# Altium PCB traintrackr.PcbDoc
Units mm, origin at the board's own origin, x right, y up, seen from the top; angles counter-clockwise.
Board outline 304.8 x 102.87 mm, 2 copper layers (Top Layer, Bottom Layer); 146 components, 38 nets, 354 pads, 138 vias.
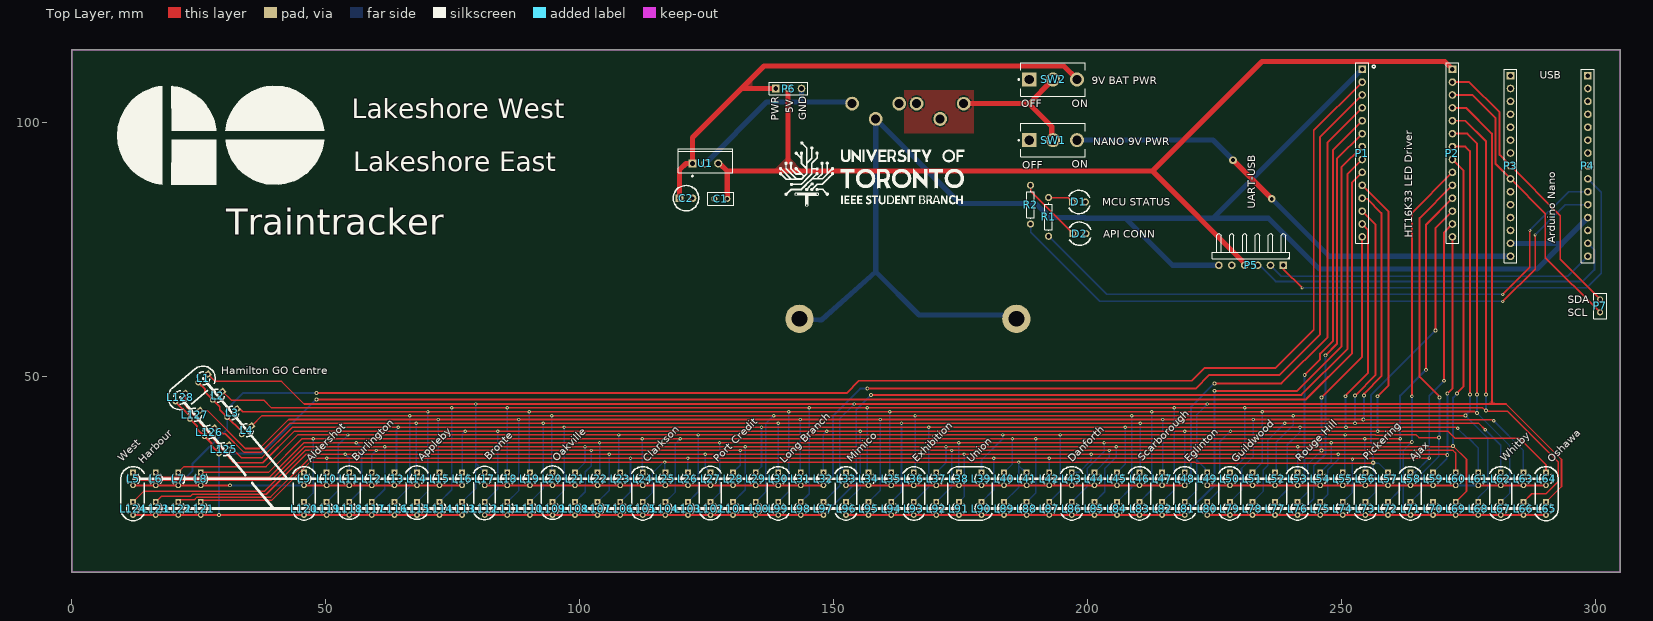
[diagram p0: Top Layer view]
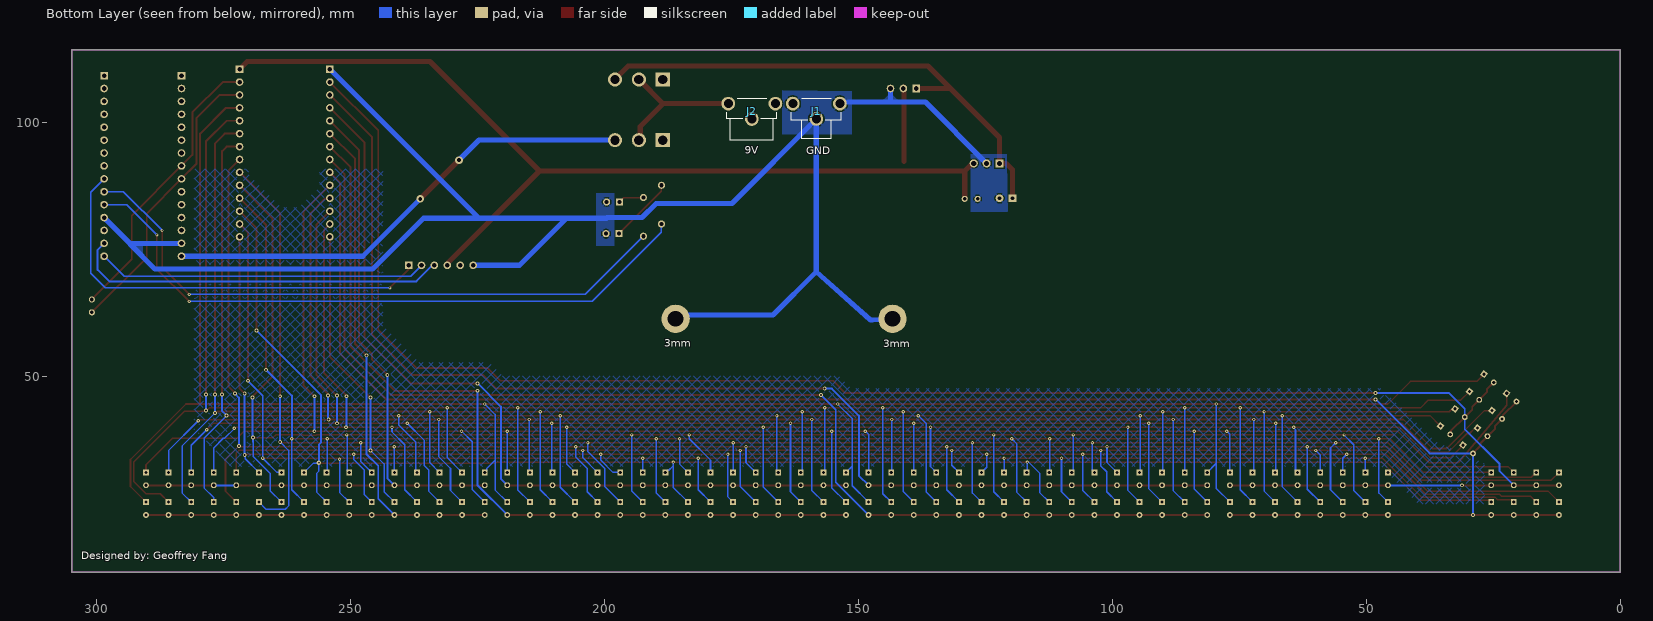
[diagram p1: Bottom Layer view, seen from below]

## Layer stack, top to bottom
Top Solder: solder mask 0.0102, Solder Resist, Dk 3.5
Top Layer: signal copper 0.0356
Dielectric 1: dielectric 0.32, FR-4, Dk 4.8
Bottom Layer: signal copper 0.0356
Bottom Solder: solder mask 0.0102, Solder Resist, Dk 3.5

## Board outline
0,11.43 0,114.3 304.8,114.3 304.8,11.43

## Design rules (kind name [scope] priority, off if disabled: settings)
Clearance [All] p1: gap=0.254 ignorepadtopadclearanceinfootprint=FALSE except(0: Arc-Hole Track-Hole SMDPad-Hole THPad-Hole Via-Hole Fill-Hole Poly-Hole Region-Hole Text-Hole)
HoleSize [All] p1: absolutevalues=TRUE maxlimit=22.86 minlimit=0.305 maxpercent=80.000 minpercent=20.000
MinimumSolderMaskSliver [All] p1: minsoldermaskwidth=0.025
PolygonConnect [All] p1: connectstyle=Relief reliefconductorwidth=0.381 reliefentries=4 polygonreliefangle="90 Angle" conductorbypadedge=TRUE mindistance=0.381 enablemindistance=FALSE airgapwidth=0.254
RoutingVias [All] p1: holewidth=0.305 width=0.61 viastyle="Through Hole" minholewidth=0.305 minwidth=0.61 maxholewidth=2.54 maxwidth=5.08
SilkToSilkClearance [All] p1: silktosilkclearance=0
SilkToSolderMaskClearance [IsPad] p1: minsilkscreentomaskgap=0.025 clearancetoexposedcopper=TRUE
SolderMaskExpansion [All] p1: expansion=0.102 istentingtop=FALSE
Width [All] p1: maxlimit=2.54 minlimit=0.254 preferedwidth=0.381 minimp=50.000000 maximp=50.000000 favimp=50.000000
26 further rules are at their usual default settings.

## Classes and differential pairs
net class C[7..0]: C0 C1 C2 C3 C4 C5 C6 C7
net class A[15..0]: A0 A1 A2 A3 A4 A5 A6 A7 A8 A9 A10 A11 A12 A13 A14 A15
component class traintrackr_schematic: C1 C2 D1 D2 J1 J2 P1 P2 P3 P4 P5 P6 P7 R1 R2 SW1 SW2 U1
component class led_matrix: L1 L2 L3 L4 L5 L6 L7 L8 L9 L10 L11 L12 L13 L14 L15 L16 L17 L18 L19 L20 L21 L22 L23 L24 L25 L26 L27 L28 L29 L30 L31 L32 L33 L34 L35 L36 L37 L38 L39 L40 L41 L42 L43 L44 L45 L46 L47 L48 L49 L50 L51 L52 L53 L54 L55 L56 L57 L58 L59 L60 L61 L62 L63 L64 L65 L66 L67 L68 L69 L70 L71 L72 L73 L74 L75 L76 L77 L78 L79 L80 L81 L82 L83 L84 L85 L86 L87 L88 L89 L90 L91 L92 L93 L94 L95 L96 L97 L98 L99 L100 L101 L102 L103 L104 L105 L106 L107 L108 L109 L110 L111 L112 L113 L114 L115 L116 L117 L118 L119 L120 L121 L122 L123 L124 L125 L126 L127 L128

## Components (designator, comment, footprint, x,y, rotation, side; value= is the part's Value field where it differs from the comment)
C1 "Cap" RAD-0.1 127.762,84.963 r0 top value=0.1UF
C2 "Cap Pol1" "Capacitor 330nF" 119.634,85.09 r0 top value=0.33uF
D1 "POWER" LED_5MM 196.977,84.348 r0 top
D2 "API CONNECTION" LED_5MM 197.104,78.105 r0 top
J1 "593 - GND" FP-593-MFG 158.242,100.711 r0 bottom
J2 "594 - 9V" FP-594-MFG 170.942,100.584 r0 bottom
L1 "HC" PCBComponent_1 26.828,50.443 r220 top
L2 "HC1" PCBComponent_1 29.685,47.038 r220 top
L3 "HC2" PCBComponent_1 32.542,43.633 r220 top
L4 "HC3" PCBComponent_1 35.399,40.228 r220 top
L5 "WH" PCBComponent_1 12.065,31.115 r270 top
L6 "WH1" PCBComponent_1 16.51,31.115 r270 top
L7 "WH2" PCBComponent_1 20.955,31.115 r270 top
L8 "WH3" PCBComponent_1 25.4,31.115 r270 top
L9 "AS" PCBComponent_1 45.72,31.115 r270 top
L10 "AS1" PCBComponent_1 50.165,31.115 r270 top
L11 "BR" PCBComponent_1 54.61,31.115 r270 top
L12 "BR1" PCBComponent_1 59.055,31.115 r270 top
L13 "BR2" PCBComponent_1 63.5,31.115 r270 top
L14 "AB" PCBComponent_1 67.945,31.115 r270 top
L15 "AB1" PCBComponent_1 72.39,31.115 r270 top
L16 "AB2" PCBComponent_1 76.835,31.115 r270 top
L17 "BT" PCBComponent_1 81.28,31.115 r270 top
L18 "BT1" PCBComponent_1 85.725,31.115 r270 top
L19 "BT2" PCBComponent_1 90.17,31.115 r270 top
L20 "OK" PCBComponent_1 94.615,31.115 r270 top
L21 "OK1" PCBComponent_1 99.06,31.115 r270 top
L22 "OK2" PCBComponent_1 103.505,31.115 r270 top
L23 "OK3" PCBComponent_1 107.95,31.115 r270 top
L24 "CS" PCBComponent_1 112.395,31.115 r270 top
L25 "CS1" PCBComponent_1 116.84,31.115 r270 top
L26 "CS2" PCBComponent_1 121.285,31.115 r270 top
L27 "PC" PCBComponent_1 125.73,31.115 r270 top
L28 "PC1" PCBComponent_1 130.175,31.115 r270 top
L29 "PC2" PCBComponent_1 134.62,31.115 r270 top
L30 "LB" PCBComponent_1 139.065,31.115 r270 top
L31 "LB1" PCBComponent_1 143.51,31.115 r270 top
L32 "LB2" PCBComponent_1 147.955,31.115 r270 top
L33 "MM" PCBComponent_1 152.4,31.115 r270 top
L34 "MM1" PCBComponent_1 156.845,31.115 r270 top
L35 "MM2" PCBComponent_1 161.29,31.115 r270 top
L36 "EX" PCBComponent_1 165.735,31.115 r270 top
L37 "EX1" PCBComponent_1 170.18,31.115 r270 top
L38 "UN" PCBComponent_1 174.625,31.115 r270 top
L39 "UN" PCBComponent_1 179.07,31.115 r270 top
L40 "UN1" PCBComponent_1 183.515,31.115 r270 top
L41 "UN2" PCBComponent_1 187.96,31.115 r270 top
L42 "UN3" PCBComponent_1 192.405,31.115 r270 top
L43 "DN" PCBComponent_1 196.85,31.115 r270 top
L44 "DN1" PCBComponent_1 201.295,31.115 r270 top
L45 "DN2" PCBComponent_1 205.74,31.115 r270 top
L46 "SC" PCBComponent_1 210.185,31.115 r270 top
L47 "SC1" PCBComponent_1 214.63,31.115 r270 top
L48 "EG" PCBComponent_1 219.075,31.115 r270 top
L49 "EG1" PCBComponent_1 223.52,31.115 r270 top
L50 "GW" PCBComponent_1 227.965,31.115 r270 top
L51 "GW1" PCBComponent_1 232.41,31.115 r270 top
L52 "GW2" PCBComponent_1 236.855,31.115 r270 top
L53 "RH" PCBComponent_1 241.3,31.115 r270 top
L54 "RH1" PCBComponent_1 245.745,31.115 r270 top
L55 "RH2" PCBComponent_1 250.19,31.115 r270 top
L56 "PK" PCBComponent_1 254.635,31.115 r270 top
L57 "PK1" PCBComponent_1 259.08,31.115 r270 top
L58 "AJ" PCBComponent_1 263.525,31.115 r270 top
L59 "AJ1" PCBComponent_1 267.97,31.115 r270 top
L60 "AJ2" PCBComponent_1 272.415,31.115 r270 top
L61 "AJ3" PCBComponent_1 276.86,31.115 r270 top
L62 "WB" PCBComponent_1 281.305,31.115 r270 top
L63 "WB1" PCBComponent_1 285.75,31.115 r270 top
L64 "DCO" PCBComponent_1 290.195,31.115 r270 top
L65 "DCO" PCBComponent_1 290.195,25.273 r270 top
L66 "DCO1" PCBComponent_1 285.75,25.273 r270 top
L67 "WB" PCBComponent_1 281.305,25.273 r270 top
L68 "WB1" PCBComponent_1 276.86,25.273 r270 top
L69 "WB2" PCBComponent_1 272.415,25.273 r270 top
L70 "WB3" PCBComponent_1 267.97,25.273 r270 top
L71 "AJ" PCBComponent_1 263.525,25.273 r270 top
L72 "AJ1" PCBComponent_1 259.08,25.273 r270 top
L73 "PK" PCBComponent_1 254.635,25.273 r270 top
L74 "PK1" PCBComponent_1 250.19,25.273 r270 top
L75 "PK2" PCBComponent_1 245.745,25.273 r270 top
L76 "RH" PCBComponent_1 241.3,25.273 r270 top
L77 "RH1" PCBComponent_1 236.855,25.273 r270 top
L78 "RH2" PCBComponent_1 232.41,25.273 r270 top
L79 "GW" PCBComponent_1 227.965,25.273 r270 top
L80 "GW1" PCBComponent_1 223.52,25.273 r270 top
L81 "EG" PCBComponent_1 219.075,25.273 r270 top
L82 "EG1" PCBComponent_1 214.63,25.273 r270 top
L83 "SC" PCBComponent_1 210.185,25.273 r270 top
L84 "SC1" PCBComponent_1 205.74,25.273 r270 top
L85 "SC2" PCBComponent_1 201.295,25.273 r270 top
L86 "DN" PCBComponent_1 196.85,25.273 r270 top
L87 "DN1" PCBComponent_1 192.405,25.273 r270 top
L88 "DN2" PCBComponent_1 187.96,25.273 r270 top
L89 "DN3" PCBComponent_1 183.515,25.273 r270 top
L90 "UN" PCBComponent_1 179.07,25.273 r270 top
L91 "UN" PCBComponent_1 174.625,25.273 r270 top
L92 "UN1" PCBComponent_1 170.18,25.273 r270 top
L93 "EX" PCBComponent_1 165.735,25.273 r270 top
L94 "EX1" PCBComponent_1 161.29,25.273 r270 top
L95 "EX2" PCBComponent_1 156.845,25.273 r270 top
L96 "MM" PCBComponent_1 152.4,25.273 r270 top
L97 "MM1" PCBComponent_1 147.955,25.273 r270 top
L98 "MM2" PCBComponent_1 143.51,25.273 r270 top
L99 "LB" PCBComponent_1 139.065,25.273 r270 top
L100 "LB1" PCBComponent_1 134.62,25.273 r270 top
L101 "LB2" PCBComponent_1 130.175,25.273 r270 top
L102 "PC" PCBComponent_1 125.73,25.273 r270 top
L103 "PC1" PCBComponent_1 121.285,25.273 r270 top
L104 "PC2" PCBComponent_1 116.84,25.273 r270 top
L105 "CS" PCBComponent_1 112.395,25.273 r270 top
L106 "CS1" PCBComponent_1 107.95,25.273 r270 top
L107 "CS2" PCBComponent_1 103.505,25.273 r270 top
L108 "CS3" PCBComponent_1 99.06,25.273 r270 top
L109 "OK" PCBComponent_1 94.615,25.273 r270 top
L110 "OK1" PCBComponent_1 90.17,25.273 r270 top
L111 "OK2" PCBComponent_1 85.725,25.273 r270 top
L112 "BT" PCBComponent_1 81.28,25.273 r270 top
L113 "BT1" PCBComponent_1 76.835,25.273 r270 top
L114 "BT2" PCBComponent_1 72.39,25.273 r270 top
L115 "AB" PCBComponent_1 67.945,25.273 r270 top
L116 "AB1" PCBComponent_1 63.5,25.273 r270 top
L117 "AB2" PCBComponent_1 59.055,25.273 r270 top
L118 "BR" PCBComponent_1 54.61,25.273 r270 top
L119 "BR1" PCBComponent_1 50.165,25.273 r270 top
L120 "AS" PCBComponent_1 45.72,25.273 r270 top
L121 "AS-WH1" PCBComponent_1 25.4,25.273 r270 top
L122 "AS-WH2" PCBComponent_1 20.955,25.273 r270 top
L123 "AS-WH3" PCBComponent_1 16.51,25.273 r270 top
L124 "WH" PCBComponent_1 12.065,25.273 r270 top
L125 "AS-HC1" PCBComponent_1 30.924,36.473 r220 top
L126 "AS-HC2" PCBComponent_1 28.067,39.878 r220 top
L127 "AS-HC3" PCBComponent_1 25.21,43.283 r220 top
L128 "HC" PCBComponent_1 22.353,46.688 r220 top
P1 "HT16K33 LEFT" HDR1X14 254,110.49 r270 top
P2 "HT16K33 RIGHT" HDR1X14 271.78,110.49 r270 top
P3 "NANO Vin side, USB side pin 1" HDR1X15 283.21,109.22 r270 top
P4 "NANO Tx1 side, USB side pin 1" HDR1X15 298.45,109.22 r270 top
P5 "UART - GND LEFT" HDR1X6H 238.506,71.882 r180 top
P6 "Extra Power" HDR1X3 138.557,106.68 r0 top
P7 "I2C" RAD-0.1 300.863,63.881 r270 top
R1 "Res1" AXIAL-0.3 192.278,81.407 r90 top value=100
R2 "Res1" AXIAL-0.3 188.722,83.82 r90 top value=100
SW1 "1101M2S3CQE2" FP-1101M2S3CQE2-MFG 193.167,96.52 r0 top
SW2 "1101M2S3CQE2" FP-1101M2S3CQE2-MFG 193.167,108.458 r0 top
U1 "LM340T-5.0" NDE0003A 124.714,91.948 r0 top

## Footprints (in the part's own frame and the unit in brackets; to place one, negate y for a bottom-side part, rotate by r counter-clockwise, add the part's x,y. Pads: shape width x height; smd on the part's side, far side on the other; paste and mask are expansions set on the pad)
AXIAL-0.3 [mm] "Axial Device, Thru-Hole; 2 Leads; 0.3 in Pin Spacing"
  round 1.4 hole 0.85: 1(-3.81,0) 2(3.81,0)
  silkscreen extent -2.77,-0.76 2.77,0.76
"Capacitor 330nF" [mil]
  rect 60x60 hole 30: 1(0,0)
  round 60 hole 30: 2(100,0)
  silkscreen extent -48,-98 148,98
FP-593-MFG [mm]
  round 2.72 hole 1.77 paste-1000 mask+0: 1(-4.635,-2.99) 1(0,0.01) 1(4.635,-2.99)
  silkscreen extent -4.95,-3.95 4.95,3.95, body extent -4.83,-3.77 4.83,3.75, height 14.22
FP-594-MFG [mm]
  round 2.72 hole 1.77 paste-1000 mask+0: 1(-4.635,-3.115) 1(0,-0.115) 1(4.635,-3.115)
  silkscreen extent -4.95,-4.08 4.95,4.08, body extent -4.83,-3.89 4.83,3.88, height 14.22
FP-1101M2S3CQE2-MFG [mm]
  rect 2.8x2.8 hole 1.85 paste-1000 mask+0: 1(-4.7,0)
  round 2.8 hole 1.85 paste-1000 mask+0: 2(0,0) 3(4.7,0)
  silkscreen extent -6.87,-3.3 6.35,3.3, body extent -6.45,-3.4 6.45,3.4, height 0.25
HDR1X3 [mm] "Connector; Header; 3 Position"
  rect 1.5x1.5 hole 0.9: 1(0,0)
  round 1.5 hole 0.9: 2(2.54,0) 3(5.08,0)
  silkscreen extent -1.27,-1.27 6.35,1.27
HDR1X6H [mm] "Connector; Header; 6 Position; Right Angle"
  rect 1.5x1.5 hole 0.9: 1(0,0)
  round 1.5 hole 0.9: 2(2.54,0) 3(5.08,0) 4(7.62,0) 5(10.16,0) 6(12.7,0)
  silkscreen extent -1.27,-6.35 13.97,-1.27
HDR1X14 [mm] "Connector; Header; 14 Position"
  rect 1.5x1.5 hole 0.9: 1(0,0)
  round 1.5 hole 0.9: 2(2.54,0) 3(5.08,0) 4(7.62,0) 5(10.16,0) 6(12.7,0) 7(15.24,0) 8(17.78,0) 9(20.32,0) 10(22.86,0) 11(25.4,0) 12(27.94,0) 13(30.48,0) 14(33.02,0)
  silkscreen extent -1.27,-1.27 34.29,1.27
HDR1X15 [mm] "Connector; Header; 15 Position"
  rect 1.5x1.5 hole 0.9: 1(0,0)
  round 1.5 hole 0.9: 2(2.54,0) 3(5.08,0) 4(7.62,0) 5(10.16,0) 6(12.7,0) 7(15.24,0) 8(17.78,0) 9(20.32,0) 10(22.86,0) 11(25.4,0) 12(27.94,0) 13(30.48,0) 14(33.02,0) 15(35.56,0)
  silkscreen extent -1.27,-1.27 36.83,1.27
LED_5MM [mil]
  rect 55x55 hole 30: 1(0,0)
  round 55 hole 30: 2(100,0)
  silkscreen extent -28,-91 135,91
NDE0003A [mm] "FM, 3-Leads, Body 10.7x4.7mm, Pitch 2.54mm"
  rect 1.6x1.6 hole 1: 1(-2.54,0)
  round 1.6 hole 1: 2(0,0) 3(2.54,0)
  silkscreen extent -5.35,-2.62 5.35,2.85, body extent -5.4,-1.9 5.4,2.9, height 19.4
PCBComponent_1 [mil]
  rect 45x45 hole 25: 1(0,0)
  round 45 hole 25: 2(100,0)
  silkscreen extent 14,-51 86,51
RAD-0.1 [mm] "Radial Cap, Thru-Hole; 2 Leads; 0.1 in Pin Spacing"
  round 1.2 hole 0.7: 1(-1.27,0) 2(1.27,0)
  silkscreen extent -2.54,-1.27 2.54,1.27

## Part data
C1: library part "CAP CER 0.1UF 50V X7R RADIAL", "Capacitor", Manufacturer Part Number=K104M15X7RF5TH5, Voltage Rating=50V, LatestRevisionDate=17-Jul-2002, LatestRevisionNote="Re-released for DXP Platform.", Published=8-Jun-2000, Publisher="Altium Limited"
C2: "Polarized Capacitor (Radial)", LatestRevisionDate=17-Jul-2002, LatestRevisionNote="Re-released for DXP Platform.", PackageDescription="Polarized Capacitor (Radial); 2 Leads", PackageReference=RB7.6-15, Published=8-Jun-2000, Publisher="Altium Limited"
D1 D2 L1 L2 L3 L4 L5 L6 L7 L8 L9 L10 L11 L12 L13 L14 L15 L16 L17 L18 L19 L20 L21 L22 L23 L24 L25 L26 L27 L28 L29 L30 L31 L32 L33 L34 L35 L36 L37 L38 L39 L40 L41 L42 L43 L44 L45 L46 L47 L48 L49 L50 L51 L52 L53 L54 L55 L56 L57 L58 L59 L60 L61 L62 L63 L64 L65 L66 L67 L68 L69 L70 L71 L72 L73 L74 L75 L76 L77 L78 L79 L80 L81 L82 L83 L84 L85 L86 L87 L88 L89 L90 L91 L92 L93 L94 L95 L96 L97 L98 L99 L100 L101 L102 L103 L104 L105 L106 L107 L108 L109 L110 L111 L112 L113 L114 L115 L116 L117 L118 L119 L120 L121 L122 L123 L124 L125 L126 L127 L128: library part LED1, "Typical RED GaAs LED", LatestRevisionDate=08-Jul-2005, LatestRevisionNote="Mech Layer 1 removed.", PackageDescription="LED; 2 Leads", PackageReference=LED-1, Published=8-Jun-2000, Publisher="Altium Limited"
J1: library part CMP-19636-000031-1, "BATTERY CONTACT SNAP 9V PC PIN", Package Quantity=100, Body Material=Steel, Body Plating=Tin, Connector Type="Snap in", Contact Material=Steel, Contact Plating=Nickel, Contact Type=Snap-In, Gender=Male, Lead Free="Lead Free", Length=9.65mm, Material=Steel, Material Thickness=0.15inch, Mount="Through Hole", Number of Batteries=1, Number of Cells=1, Orientation="Right Angle", Packaging=Bulk, Reach SVHC Compliant=Yes, RoHS Compliant=Yes, Series=-, Termination="PC Pin", Thickness=0.015inch
J2: library part CMP-19636-000029-1, "BATTERY CONTACT SNAP 9V PC PIN", Package Quantity=100, Body Material=Steel, Body Plating=Tin, Connector Type="Snap in", Contact Material=Steel, Contact Plating=Nickel, Contact Type=Snap-In, Gender=Female, Lead Free="Lead Free", Length=9.65mm, Material=Steel, Material Thickness=0.15inch, Mount="Through Hole", Number of Batteries=1, Number of Cells=1, Orientation="Right Angle", Packaging=Bulk, Reach SVHC Compliant=Yes, RoHS Compliant=Yes, Series=-, Termination="PC Pin", Thickness=0.015inch
P1 P2: library part "Header 14", "Header, 14-Pin", Supplier Part Number 1=S7012-ND, LatestRevisionDate=17-Jul-2002, LatestRevisionNote="Re-released for DXP Platform.", Publisher="Altium Limited", Supplier 1=Digi-Key
P3 P4: library part "Header 15", "Header, 15-Pin", Supplier Part Number 1=S7013-ND, LatestRevisionDate=17-Jul-2002, LatestRevisionNote="Re-released for DXP Platform.", Publisher="Altium Limited", Supplier 1=Digi-Key
P5: library part "Header 6H", "Header, 6-Pin, Right Angle", Supplier Part Number 1=S1111EC-06-ND, LatestRevisionDate=17-Jul-2002, LatestRevisionNote="Re-released for DXP Platform.", Publisher="Altium Limited", Supplier 1=Digi-Key
P6: library part "Header 3", "Header, 3-Pin", Supplier Part Number 1=2057-PH1-20-UA-ND, LatestRevisionDate=17-Jul-2002, LatestRevisionNote="Re-released for DXP Platform.", Publisher="Altium Limited", Supplier 1=Digi-Key
P7: library part "Header 2H", "Header, 2-Pin, Right Angle", Supplier Part Number 1=2057-PH1-20-UA-ND, LatestRevisionDate=17-Jul-2002, LatestRevisionNote="Re-released for DXP Platform.", Publisher="Altium Limited", Supplier 1=Digi-Key
R1 R2: "Resistor", LatestRevisionDate=17-Jul-2002, LatestRevisionNote="Re-released for DXP Platform.", PackageDescription="Axial Device, Thru-Hole; 2 Leads; 0.3 in Pin Spacing", PackageReference=AXIAL-0.3, Published=8-Jun-2000, Publisher="Altium Limited"
SW1 SW2: library part CMP-10038-000019-1, "SWITCH SLIDE SPDT 6A 120V", Actuator Color=Black, Contact Current Rating=6A, Contact Resistance=10mR, Flammability Rating="UL94 V-0", Insulation Resistance=1GR, Max Operating Temperature=65°C, Max Voltage Rating (AC)=250V, Max Voltage Rating (DC)=28V, Min Operating Temperature=-30°C, Package Quantity=1, Voltage Rating (AC)=120V, Actuator Length=5.08mm, Actuator Material=Nylon, Actuator Type=Standard, Approvals=UL, Body Material="Stainless Steel", Contact Material=Copper, Contact Plating=Silver, Current Rating=6A, Depth=6.6mm, Electrical Life=40000Cycles, Housing Material="Stainless Steel", Lead Free="Lead Free", Length=12.7mm, Max Current Rating=6A, Mount="Through Hole", Number of Poles=1, Number of Positions=3, Orientation=Vertical, Packaging=Bulk, REACH SVHC="No SVHC", Series=1000, Switch Function=On-On, Switch Travel=2.16mm, Termination="PC Pins", Throw Configuration=SPDT, Voltage Rating (DC)=28V
U1: library part CMP-0062-02468-3, "Series 3-Terminal Positive Regulators, 3-pin TO-220", Manufacturer="Texas Instruments", PackageTopMarking="NSUZXYTTE#*LM340T5*7805 P+", PowerWise=N, ComponentLink1Description="Datasheet URL", ComponentLink1URL=http://www.ti.com/general/docs/lit/getliterature.tsp?genericPartNumber=LM340-N&fileType=pdf, CompType="LDO IC", PackageDescription="TO-220, Molded, 3 Lead, Straight", PackageReference=NDE0003A, PinCount=3, RoHS=N

## Free pads (board coordinates)
  round 5.588 hole 3.1: 1(143.242,61.341) 2(185.942,61.341)

## Via types
v1: diameter 0.66, hole 0.305, Top Layer to Bottom Layer, 91 vias
v2: diameter 0.762, hole 0.381, Top Layer to Bottom Layer, 33 vias
v3: diameter 0.711, hole 0.356, Top Layer to Bottom Layer, 6 vias
v4: diameter 0.61, hole 0.305, Top Layer to Bottom Layer, 5 vias
v5: diameter 1.524, hole 0.762, Top Layer to Bottom Layer, 2 vias
v6: diameter 0.889, hole 0.381, Top Layer to Bottom Layer, 1 vias

## Nets (pads, with @x,y where several pads share a name; then routed paths per layer and width w, separated by ;. In a path a pad name is that pad's centre, name@x,y a point inside that pad or via, vN(x,y) a via of type N, cw(c..) or ccw(c..) an arc to the next point about the centre after c; other vN are vias at no path point)
9V: J2.1 SW1.2 SW2.2 | length 28.7
  Top Layer w1.016: J2.1@175.577,103.699 188.408,103.699 ; SW1.2 192.913,96.774 192.913,99.194 188.408,103.699 ; SW2.2 188.408,103.699
+5: C1.2 P2.1 P5.4 P6.2 U1.3 | length 200.9
  Top Layer w0.254: U1.3 U1.3@127.508,91.948
  Top Layer w1.016: U1.3@127.508,91.948 129.032,90.424 ; C1.2 129.032,90.424 ; 140.97,92.329 P6.2@140.97,106.934 ; P5.4 230.886,72.263 212.725,90.424 ; P2.1 270.268,112.002 234.303,112.002 212.725,90.424 ; 129.032,90.424 212.725,90.424
A0: L1.1 L17.1 L33.1 L49.1 L65.1 L81.1 L97.1 L113.1 P2.4 | length 416.8
  Top Layer w0.305: L1.1 28.249,49.022 41.275,49.022 45.72,44.577 v1(79.502,44.577) v1(154.051,44.577) v1(223.52,44.577) 282.321,44.577 293.243,33.655 293.243,28.321 L65.1
  Top Layer w0.381: P2.4 274.447,102.87 279.527,97.79 279.527,44.704
  Bottom Layer w0.305: L113.1 79.502,27.94 79.502,32.893 ; v1(79.502,44.577) 79.502,32.893 ; L17.1 79.502,32.893 ; L97.1 151.179,28.497 151.179,32.336 ; L33.1 151.179,32.336 ; v1(154.051,44.577) 151.179,41.705 151.179,32.336 ; L81.1 221.473,27.671 221.473,33.401 ; L49.1 223.121,31.514 223.121,31.895 221.615,33.401 221.473,33.401 ; v1(223.52,44.577) 221.473,42.53 221.473,33.401
A1: L2.1 L18.1 L34.1 L50.1 L66.1 L82.1 L98.1 L114.1 P2.5 | length 440
  Top Layer w0.305: L2.1 31.384,45.339 37.79,45.339 39.314,43.815 v1(74.803,43.815) v1(85.725,43.815) v1(145.161,43.815) v1(156.591,43.815) v1(217.043,43.815) v1(230.886,43.815) 277.752,43.815 278.26,43.307 v2(278.384,43.307) 278.471,43.22 278.758,43.22 278.791,43.186 282.569,43.186 292.608,33.147 292.608,29.337 290.195,26.924 287.401,26.924 L66.1
  Top Layer w0.381: P2.5 274.32,100.33 278.384,96.266 v2(278.384,46.482)
  Bottom Layer w0.305: L114.1 74.803,27.686 v1(74.803,43.815) ; L18.1 v1(85.725,43.815) ; L98.1 145.161,26.924 v1(145.161,43.815) ; v1(156.591,43.815) 156.591,31.369 L34.1 ; L82.1 217.043,27.686 v1(217.043,43.815) ; L50.1 230.886,34.036 v1(230.886,43.815)
  Bottom Layer w0.381: v2(278.384,43.307) v2(278.384,46.482)
A2: L3.1 L19.1 L35.1 L51.1 L67.1 L83.1 L99.1 L115.1 P2.6 | length 416.8
  Top Layer w0.305: L3.1 33.061,43.633 33.642,43.053 v1(70.104,43.053) v1(90.043,43.053) v1(141.097,43.053) v1(161.036,43.053) v1(212.598,43.053) v1(234.315,43.053) 234.366,43.104 276.177,43.104 276.482,42.799 v2(276.606,42.799)
  Top Layer w0.381: P2.6 274.701,97.79 276.606,95.885 v2@276.606,46.609
  Bottom Layer w0.305: L115.1 70.104,27.432 v1(70.104,43.053) ; v1(90.043,43.053) 90.043,31.242 L19.1 ; L99.1 141.097,27.305 v1(141.097,43.053) ; v1(161.036,43.053) 161.036,31.369 L35.1 ; L83.1 212.598,27.686 v1(212.598,43.053) ; L51.1 234.315,33.02 v1(234.315,43.053) ; v2(276.606,42.799) 283.083,36.322 283.083,27.051 L67.1
  Bottom Layer w0.381: v2(276.606,42.799) v2(276.606,46.482)
A3: L4.1 L20.1 L36.1 L52.1 L68.1 L84.1 L100.1 L116.1 P2.7 | length 405.8
  Top Layer w0.305: L4.1 37.462,42.291 v1(66.548,42.291) v1(94.488,42.291) v1(138.176,42.291) v1(165.989,42.291) v1(208.661,42.291) v1@240.386,42.291 ; v1@240.411,42.24 240.449,42.278 274.282,42.278 v2(274.32,42.316)
  Top Layer w0.381: P2.7 274.32,95.25 275.209,94.361 v2(275.209,46.482)
  Bottom Layer w0.305: L116.1 66.548,28.321 v1(66.548,42.291) ; v1(94.488,42.291) 94.488,31.242 L20.1 ; L100.1 136.574,27.227 136.574,40.689 v1(138.176,42.291) ; L36.1 165.989,31.369 v1(165.989,42.291) ; L84.1 208.661,28.194 v1(208.661,42.291) ; L52.1 237.109,31.369 237.109,37.084 240.411,40.386 v1(240.411,42.266) ; v2(274.32,42.316) 274.32,42.291 278.765,37.846 278.765,28.067 276.86,26.162 L68.1
  Bottom Layer w0.381: v2(274.32,42.316) 274.345,42.316 275.209,43.18 v2(275.209,46.482)
A4: L5.1 L21.1 L37.1 L53.1 L69.1 L85.1 L101.1 L117.1 P2.8 | length 387.9
  Top Layer w0.305: L5.1 13.589,29.591 17.244,29.591 17.256,29.578 21.926,29.578 21.939,29.591 24.416,29.591 24.429,29.578 26.371,29.578 26.384,29.591 39.243,29.591 45.847,36.195 v1(61.595,36.195) v1(101.022,36.195) v1(132.588,36.195) v1(172.085,36.195) v1(205.613,36.195) v1(241.3,36.195) v2@271.907,36.195 ; v2(271.907,36.322) 274.549,33.68 274.549,27.407 L69.1
  Top Layer w0.381: P2.8 273.939,90.551 273.939,48.006 v2@272.542,46.609
  Bottom Layer w0.305: L117.1 61.595,27.813 v1(61.595,36.195) ; L21.1 101.022,33.077 v1(101.022,36.195) ; L101.1 132.588,27.686 v1(132.588,36.195) ; L37.1 172.085,33.02 v1(172.085,36.195) ; L85.1 203.327,27.305 203.327,31.877 205.613,34.163 v1(205.613,36.195) ; L53.1 v1(241.3,36.195)
  Bottom Layer w0.381: v2(271.907,36.322) 271.907,45.847 v2(272.669,46.609)
A5: L6.1 L22.1 L38.1 L54.1 L70.1 L86.1 L102.1 L118.1 P2.9 | length 385.3
  Top Layer w0.305: L6.1 17.488,30.137 21.695,30.137 21.708,30.15 24.647,30.15 24.66,30.137 26.14,30.137 26.153,30.15 38.913,30.15 45.72,36.957 v1(56.007,36.957) v1(103.886,36.957) v1(127.508,36.957) v1(174.625,36.957) v1(203.2,36.957) 263.528,36.957 263.655,37.084 v2(263.779,37.084)
  Top Layer w0.381: v2(263.779,46.101) 263.779,82.169 P2.9
  Bottom Layer w0.305: L118.1 57.023,27.686 57.023,35.941 v1(56.007,36.957) ; L22.1 103.886,31.496 v1(103.886,36.957) ; L102.1 127.508,27.051 v1(127.508,36.957) ; L38.1 v1(174.625,36.957) ; L86.1 199.898,28.321 199.898,31.877 203.2,35.179 v1(203.2,36.957) ; L54.1 247.904,33.274 v1(247.904,36.957) ; v2(263.779,37.084) 262.128,35.433 262.128,24.511 262.763,23.876 266.573,23.876 L70.1
  Bottom Layer w0.381: v2(263.779,37.084) v2(263.779,46.101)
A6: L7.1 L23.1 L39.1 L55.1 L71.1 L87.1 L103.1 L119.1 P2.10 | length 387.6
  Top Layer w0.305: L7.1 22.098,32.258 38.227,32.258 44.45,38.481 v1(54.356,38.481) v1(107.696,38.481) v1(123.317,38.481) v1(183.261,38.481) v1(194.564,38.481) v1(250.698,38.481) 256.707,38.481 256.732,38.456 259.258,38.456 259.283,38.481 264.668,38.481 265.176,37.973 v2(269.113,37.973)
  Top Layer w0.381: v2@269.24,45.974 265.303,49.911 265.303,51.308 265.303,81.153 P2.10
  Bottom Layer w0.305: L119.1 52.431,27.539 52.431,36.556 v1(54.356,38.481) ; v1(107.696,38.481) 107.696,31.369 L23.1 ; L103.1 123.317,27.305 v1(123.317,38.481) ; L39.1 179.07,33.528 183.261,37.719 v1(183.261,38.481) ; L87.1 194.564,27.432 v1(194.564,38.481) ; L55.1 250.609,31.534 250.609,38.296 250.698,38.385 v1(250.698,38.481) ; L71.1 265.767,27.515 265.767,30.944 269.113,34.29 269.113,37.013 269.133,37.033 269.133,37.953 v2(269.113,37.973) 269.113,38.069 v2@269.24,38.196
  Bottom Layer w0.381: v2@269.24,38.196 v2(269.24,45.847)
A7: L8.1 L24.1 L40.1 L56.1 L72.1 L88.1 L104.1 L120.1 P2.11 | length 364.7
  Top Layer w0.305: L8.1 38.735,31.115 45.339,37.719 v1(47.498,37.719) v1(112.268,37.719) v1(119.761,37.719) v1(185.166,37.719) v1(189.738,37.719) v1(254.508,37.719) v3(261.493,37.719)
  Top Layer w0.381: v2@266.573,51.181 v2(266.573,51.308) 266.573,79.883 P2.11
  Bottom Layer w0.305: L120.1 47.498,27.051 v1(47.498,37.719) ; v1(112.268,37.719) 112.268,31.242 L24.1 ; L104.1 118.745,27.178 118.745,36.703 v1(119.761,37.719) ; L40.1 185.166,32.766 v1(185.166,37.719) ; L88.1 189.738,27.051 v1(189.738,37.719) ; v1(254.508,37.719) 254.508,31.242 L56.1 ; L72.1 261.493,27.686 v3(261.493,37.719)
  Bottom Layer w0.381: v3(261.493,37.719) 261.493,46.228 v2(266.573,51.308)
A8: L9.1 L25.1 L41.1 L57.1 L73.1 L89.1 L105.1 L121.1 P2.12 | length 325.5
  Top Layer w0.305: L121.1 25.781,25.654 39.397,25.654 46.89,33.147 v1(116.713,33.147) 221.109,33.147 221.312,32.944 256.096,32.944 v6(256.159,33.007)
  Top Layer w0.381: v2(268.478,59.055) 268.478,79.248 P2.12
  Bottom Layer w0.305: L105.1 114.3,27.178 114.3,30.988 v1@116.391,33.079 ; v1(116.713,33.147) 116.713,31.242 L25.1 ; L89.1 186.436,28.194 186.436,32.385 ; v1(186.436,33.147) 186.436,32.385 ; L41.1 187.541,31.534 187.287,31.534 186.436,32.385 ; L73.1 256.54,27.178 256.54,30.988 256.159,31.369 256.159,33.02 256.227,32.952 257.243,32.952 L57.1
  Bottom Layer w0.381: v6(256.159,33.007) 256.159,33.02 256.159,36.576 255.778,36.957 255.778,46.355 v2(268.478,59.055)
A9: L10.1 L26.1 L42.1 L58.1 L74.1 L90.1 L106.1 L122.1 P2.13 | length 339.6
  Top Layer w0.305: L122.1 21.374,25.692 24.101,25.692 24.66,26.251 39.138,26.251 46.796,33.909 v1(50.165,33.909) v1(109.982,33.909) v1(121.285,33.909) v1(181.483,33.909) v1(192.405,33.909) 252.044,33.909 v1@252.095,33.858 ; v1(252.095,33.68) v1@252.095,33.858 ; v2(267.208,33.909) 267.157,33.858 v1@252.095,33.858
  Top Layer w0.381: v2@270.123,49.143 270.123,78.353 P2.13
  Bottom Layer w0.305: L10.1 v1(50.165,33.909) ; L106.1 109.982,27.305 v1(109.982,33.909) ; L26.1 v1(121.285,33.909) ; L90.1 181.483,27.686 v1(181.483,33.909) ; L42.1 v1(192.405,33.909) ; L74.1 252.095,27.178 v1(252.095,33.68) ; L58.1 264.414,31.115 v2(267.208,33.909)
  Bottom Layer w0.381: v2(267.208,33.909) 267.208,46.228 v2(270.129,49.149)
A10: L11.1 L27.1 L43.1 L59.1 L75.1 L91.1 L107.1 L123.1 P2.14 | length 351
  Top Layer w0.305: L123.1 17.653,26.416 23.368,26.416 23.777,26.825 38.255,26.825 46.101,34.671 v1(53.848,34.671) v1(105.791,34.671) v1(124.714,34.671) v1(175.641,34.671) v1(200.66,34.671) v1(249.301,34.671) 249.326,34.696 270.488,34.696 270.64,34.544 v2(270.764,34.544)
  Top Layer w0.381: v2(270.764,46.609) 271.78,47.625 P2.14
  Bottom Layer w0.305: v1(53.848,34.671) 54.61,33.909 L11.1 ; L107.1 105.791,27.559 v1(105.791,34.671) ; v1(124.714,34.671) 124.714,32.131 L27.1 ; L91.1 175.641,26.289 v1(175.641,34.671) ; L43.1 198.247,31.115 200.66,33.528 v1(200.66,34.671) ; L75.1 247.269,26.797 247.269,31.623 249.301,33.655 v1(249.301,34.671) ; L59.1 270.677,33.822 270.677,34.457 v2(270.764,34.544)
  Bottom Layer w0.381: v2(270.764,34.544) v2(270.764,46.609)
A11: L12.1 L28.1 L44.1 L60.1 L76.1 L92.1 L108.1 L124.1 P1.14 | length 364
  Top Layer w0.305: L124.1 14.224,27.432 37.973,27.432 45.974,35.433 v1(59.944,35.433) v1(102.235,35.433) v1(131.572,35.433) v1(173.228,35.433) v1(204.216,35.433) v3(245.999,35.433) 271.907,35.433 272.415,34.925 L60.1
  Top Layer w0.381: v2(245.999,45.847) 254,53.848 P1.14
  Bottom Layer w0.305: L12.1 59.055,34.544 v1(59.944,35.433) ; L108.1 101.092,27.305 101.092,31.242 102.235,32.385 v1(102.235,35.433) ; L28.1 131.572,32.512 v1(131.572,35.433) ; L92.1 173.228,28.321 v1(173.228,35.433) ; L44.1 204.216,34.036 v1(204.216,35.433) ; L76.1 243.332,27.305 243.332,32.766 v3(245.999,35.433)
  Bottom Layer w0.381: v3(245.999,35.433) v2(245.999,45.847)
A12: L13.1 L29.1 L45.1 L61.1 L77.1 L93.1 L109.1 L125.1 P1.13 | length 374.7
  Top Layer w0.305: L125.1 33.361,34.036 37.465,34.036 43.434,40.005 43.942,40.005 43.952,40.015 64.252,40.015 v1(64.262,40.005) v1(96.901,40.005) v1(135.763,40.005) v1(168.656,40.005) v1(207.391,40.005) 241.757,40.005 v1(241.769,39.994) 272.483,39.994 272.7,39.776 v1(272.796,39.776)
  Top Layer w0.381: v2@250.698,46.228 255.195,50.725 255.195,78.815 P1.13
  Bottom Layer w0.305: L13.1 63.919,31.534 63.919,39.552 64.262,39.895 v1(64.262,40.005) ; L109.1 96.901,27.559 v1(96.901,40.005) ; L29.1 135.763,32.258 v1(135.763,40.005) ; L93.1 168.656,28.194 v1(168.656,40.005) ; L45.1 207.391,32.766 v1(207.391,40.005) ; L77.1 239.268,27.686 239.268,36.576 241.769,39.077 v1(241.769,39.994) ; v1(272.796,39.776) 274.748,37.825 274.976,37.825 276.86,35.941 L61.1
  Bottom Layer w0.381: v2(250.698,46.101) 250.698,40.221 250.825,40.094 v3(250.825,40.005)
A13: L14.1 L30.1 L46.1 L62.1 L78.1 L94.1 L110.1 L126.1 P1.12 | length 389.4
  Top Layer w0.305: L126.1 28.586,39.878 29.729,38.735 30.226,38.735 33.909,35.052 37.211,35.052 42.926,40.767 v1(67.818,40.767) v1(92.837,40.767) v1(139.065,40.767) v1(163.322,40.767) v1(210.312,40.767) v1(238.76,40.767) 252.597,40.767 v3(252.603,40.761) ; v3@252.603,40.767 253.926,40.767 253.938,40.754 277,40.754 v1(278.257,39.497)
  Top Layer w0.381: v2(252.603,46.228) 256.667,50.292 256.667,79.883 P1.12
  Bottom Layer w0.305: v1(67.818,40.767) 67.818,31.242 L14.1 ; L110.1 92.837,27.94 v1(92.837,40.767) ; L30.1 v1(139.065,40.767) ; L94.1 163.322,27.305 v1(163.322,40.767) ; L46.1 210.312,31.242 v1(210.312,40.767) ; L78.1 234.569,27.432 234.569,31.623 235.458,32.512 235.458,37.465 v1(238.76,40.767) ; v1(278.257,39.497) 281.305,36.449 L62.1
  Bottom Layer w0.381: v3(252.603,40.761) v2(252.603,46.228)
A14: L15.1 L31.1 L47.1 L63.1 L79.1 L95.1 L111.1 L127.1 P1.11 | length 404
  Top Layer w0.305: L127.1 26.694,43.283 34.163,35.814 36.957,35.814 42.672,41.529 v1(72.136,41.529) v1(88.011,41.529) v1(143.383,41.529) v1(159.131,41.529) v1(214.757,41.529) v1(232.537,41.529) 232.543,41.523 254.248,41.523 v3(254.254,41.516) ; v3@254.254,41.529 254.267,41.516 279.57,41.516 279.812,41.275 v1(279.908,41.275)
  Top Layer w0.381: P1.11 254.109,84.981 254.998,84.981 257.81,82.169 257.81,50.038 254.381,46.609 v2(254.381,46.228)
  Bottom Layer w0.305: v1(72.136,41.529) 72.136,31.369 L15.1 ; L111.1 88.011,27.559 v1(88.011,41.529) ; v1(143.383,41.529) 143.383,31.242 L31.1 ; L95.1 159.131,27.559 v1(159.131,41.529) ; L47.1 214.757,31.242 v1(214.757,41.529) ; L79.1 230.251,27.559 230.251,31.877 232.537,34.163 v1(232.537,41.529) ; v1(279.908,41.275) 285.75,35.433 L63.1
  Bottom Layer w0.381: v3(254.254,41.516) 254.254,41.606 254.381,41.733 v2(254.381,46.228)
A15: L16.1 L32.1 L48.1 L64.1 L80.1 L96.1 L112.1 L128.1 P1.10 | length 404.7
  Top Layer w0.305: L128.1 22.353,44.346 31.807,33.118 31.817,33.109 31.906,33.02 37.592,33.02 43.815,39.243 v1(77.47,39.243) v1(83.82,39.243) v1(228.092,39.243) 228.105,39.23 257.035,39.23 v3(257.048,39.218) 257.087,39.257 270.877,39.257 272.288,37.846 284.988,37.846 290.195,32.639 L64.1
  Top Layer w0.381: P1.10 259.213,82.417 259.213,48.266 v2(257.048,46.101)
  Bottom Layer w0.305: L16.1 76.835,38.608 v1(77.47,39.243) ; L112.1 83.82,27.813 v1(83.82,39.243) ; L32.1 147.955,38.608 v1(148.59,39.243) ; L96.1 155.194,28.067 v1(155.194,39.243) ; L48.1 v1(219.075,39.243) ; L80.1 225.982,27.735 225.982,37.133 v1(228.092,39.243)
  Bottom Layer w0.381: v3(257.048,39.218) v2(257.048,46.101)
C0: L1.2 L2.2 L3.2 L4.2 L5.2 L6.2 L7.2 L8.2 L9.2 L10.2 L11.2 L12.2 L13.2 L14.2 L15.2 L16.2 P1.2 | length 370.5
  Top Layer w0.381: L5.2 L6.2 L7.2 L8.2 v2@30.988,28.575 ; L1.2 26.259,47.434 26.259,46.886 L2.2 29.116,44.028 29.116,43.481 L3.2 33.308,39.289 33.308,38.741 L4.2 ; L9.2 L10.2 L11.2 L12.2 L13.2 L14.2 L15.2 L16.2 ; v2(48.133,46.736) 152.527,46.736 154.94,49.149 220.472,49.149 223.012,51.689 236.982,51.689 244.475,59.182 244.475,98.425 P1.2
  Bottom Layer w0.381: L7.2 23.749,31.369 23.749,32.766 30.596,39.613 L3.2 30.596,43.677 33.655,46.736 v2(48.133,46.736) ; v2(31.115,28.575) L9.2
C1: L17.2 L18.2 L19.2 L20.2 L21.2 L22.2 L23.2 L24.2 L25.2 L26.2 L27.2 L28.2 L29.2 L30.2 L31.2 L32.2 P1.3 | length 234.2
  Top Layer w0.381: L17.2 L18.2 L19.2 L20.2 L21.2 L22.2 L23.2 L24.2 L25.2 L26.2 L27.2 L28.2 L29.2 L30.2 L31.2 L32.2 ; v2(156.591,47.625) 221.234,47.625 223.901,50.292 237.744,50.292 245.745,58.293 245.745,97.155 P1.3
  Bottom Layer w0.381: L32.2 149.86,30.48 149.86,42.291 155.194,47.625 v2(156.591,47.625)
C2: L33.2 L34.2 L35.2 L36.2 L37.2 L38.2 L39.2 L40.2 L41.2 L42.2 L43.2 L44.2 L45.2 L46.2 L47.2 L48.2 P1.4 | length 163.2
  Top Layer w0.381: L33.2 L34.2 L35.2 L36.2 L37.2 L38.2 L39.2 L40.2 L41.2 L42.2 L43.2 L44.2 L45.2 L46.2 L47.2 L48.2 ; v2(224.917,48.641) 238.125,48.641 247.142,57.658 247.142,96.012 P1.4
  Bottom Layer w0.381: L48.2 220.345,29.845 220.345,44.069 v2(224.917,48.641)
C3: L49.2 L50.2 L51.2 L52.2 L53.2 L54.2 L55.2 L56.2 L57.2 L58.2 L59.2 L60.2 L61.2 L62.2 L63.2 L64.2 P1.5 | length 143.7
  Top Layer w0.381: L49.2 L50.2 L51.2 L52.2 L53.2 L54.2 L55.2 L56.2 L57.2 L58.2 L59.2 L60.2 ; v2(242.697,50.292) 245.745,53.34 245.745,54.483 248.285,57.023 248.285,94.615 P1.5 ; L61.2 L62.2 L63.2 L64.2
  Bottom Layer w0.381: L53.2 242.697,29.972 v2(242.697,50.292) ; L60.2 L61.2
C4: L65.2 L66.2 L67.2 L68.2 L69.2 L70.2 L71.2 L72.2 L73.2 L74.2 L75.2 L76.2 L77.2 L78.2 L79.2 L80.2 P1.6 | length 147
  Top Layer w0.381: L80.2 L79.2 L78.2 L77.2 L76.2 L75.2 L74.2 L73.2 L72.2 L71.2 L70.2 L69.2 L68.2 L67.2 L66.2 L65.2 ; v2(246.825,54.165) 249.047,56.388 249.047,92.837 P1.6
  Bottom Layer w0.381: L76.2 244.475,25.908 244.475,32.385 246.825,34.734 v2(246.825,54.165)
C5: L81.2 L82.2 L83.2 L84.2 L85.2 L86.2 L87.2 L88.2 L89.2 L90.2 L91.2 L92.2 L93.2 L94.2 L95.2 L96.2 P1.7 | length 163.3
  Top Layer w0.381: L96.2 L95.2 L94.2 L93.2 L92.2 L91.2 L90.2 L89.2 L88.2 L87.2 L86.2 L85.2 L84.2 L83.2 L82.2 L81.2 ; v2(224.917,47.18) 224.98,47.117 241.173,47.117 249.936,55.88 249.936,91.186 P1.7
  Bottom Layer w0.381: L81.2 219.115,22.733 224.917,28.535 v2(224.917,47.18)
C6: L97.2 L98.2 L99.2 L100.2 L101.2 L102.2 L103.2 L104.2 L105.2 L106.2 L107.2 L108.2 L109.2 L110.2 L111.2 L112.2 P1.8 | length 230.2
  Top Layer w0.381: L112.2 L111.2 L110.2 L109.2 L108.2 L107.2 L106.2 L105.2 L104.2 L103.2 L102.2 L101.2 L100.2 L99.2 L98.2 L97.2 ; v2(157.353,46.355) 242.062,46.355 251.079,55.372 251.079,89.789 P1.8
  Bottom Layer w0.381: L97.2 147.995,22.733 154.419,29.157 154.419,43.421 v2(157.353,46.355)
C7: L113.2 L114.2 L115.2 L116.2 L117.2 L118.2 L119.2 L120.2 L121.2 L122.2 L123.2 L124.2 L125.2 L126.2 L127.2 L128.2 P1.9 | length 358.2
  Top Layer w0.381: L124.2 L123.2 L122.2 L121.2 v2(28.956,22.733) L120.2 L119.2 L118.2 L117.2 L116.2 L115.2 L114.2 L113.2 ; L128.2 23.118,42.344 23.118,41.796 L127.2 24.641,40.273 24.641,39.725 L126.2 27.498,36.868 27.498,36.32 L125.2 ; v2@48.26,45.466 242.951,45.466 251.968,54.483 251.968,88.138 P1.9
  Bottom Layer w0.381: v2(28.956,22.733) 28.967,22.744 28.967,34.829 L125.2 37.507,34.84 v2(48.133,45.466)
DTR: P4.9 P5.1 | length 86.1
  Top Layer w0.254: P5.1@238.506,72.263 238.506,71.12 v4(242.189,67.437)
  Bottom Layer w0.254: v4(242.189,67.437) 298.196,67.437 301.117,70.358 301.117,86.233 P4.9
GND: C1.1 C2.2 D1.2 D2.2 J1.1 P1.1 P3.14 P4.12 P5.6 P6.3 pad.1 pad.2 U1.2 | length 347.4
  Bottom Layer w0.254: 199.39,81.28 199.517,81.153
  Bottom Layer w1.016: U1.2 136.779,104.013 143.764,104.013 ; pad.1 147.157,61.114 147.573,61.114 158.242,70.612 ; P6.3 143.637,104.14 143.764,104.013 ; J1.1@153.607,103.701 153.295,104.013 143.764,104.013 ; pad.2@185.942,61.849 185.688,62.103 166.751,62.103 158.242,70.612 ; 199.39,81.28 192.532,81.28 189.738,84.074 174.869,84.074 158.242,100.701 158.242,70.612 ; 199.517,81.153 207.391,81.153 ; P5.6 216.662,71.882 207.391,81.153 ; P1.1 224.663,81.153 ; P3.14 293.37,76.2 ; P4.12 293.37,76.2 ; 207.391,81.153 224.663,81.153 ; 224.663,81.153 235.585,81.153 245.618,71.12 288.417,71.12 293.37,76.073 293.37,76.2
LED1: P4.10 R1.1 | length 123.5
  Top Layer w0.254: v4(281.686,66.167) 287.02,71.501 v4(287.02,78.74)
  Bottom Layer w0.254: R1.1 203.708,66.167 v4(281.686,66.167) ; v4(287.02,78.74) 294.64,86.36 P4.10
LED2: P4.11 R2.1 | length 128.8
  Top Layer w0.254: v4(281.686,64.77) 288.036,71.12 v4(288.036,77.851)
  Bottom Layer w0.254: R2.1 188.722,78.359 202.311,64.77 v4(281.686,64.77) ; v4@288.038,77.851 294.007,83.82 P4.11
NetC2_1: C2.1 P6.1 SW2.3 U1.1 | length 103.1
  Top Layer w0.254: SW2.3 SW2.3@197.867,108.53
  Top Layer w1.016: C2.1 119.634,90.678 120.904,91.948 U1.1 122.174,97.028 131.826,106.68 ; P6.1 131.826,106.68 ; SW2.3@197.867,108.53 195.272,111.125 136.271,111.125 131.826,106.68
NetD1_1: D1.1 R1.2 | length 5.1
  Top Layer w0.254: R1.2 196.108,85.217 D1.1
NetD2_1: D2.1 R2.2 | length 13
  Top Layer w0.254: R2.2 188.722,86.487 D2.1
NetP3_15: P3.15 SW1.3 | length 95
  Top Layer w0.381: v5@235.966,84.963 v5(236.22,84.963)
  Top Layer w1.016: v5(228.6,92.583) 236.054,85.129 236.054,85.032 v5@235.985,84.963
  Bottom Layer w1.016: SW1.3 224.663,96.52 v5(228.6,92.583) ; v5(236.22,84.963) 247.523,73.66 P3.15
RX: P4.14 P5.3 | length 74.4
  Bottom Layer w0.381: P5.3@233.426,72.263 236.982,68.707 297.434,68.707 299.72,70.993 299.72,74.93 P4.14
SCL: P2.3 P3.9 P7.2 | length 57.2
  Top Layer w0.254: P3.9 290.068,82.042 290.068,73.406 P7.2
  Top Layer w0.381: P2.3 275.717,105.41 280.289,100.838 280.289,91.821 P3.9
SDA: P2.2 P3.8 P7.1 | length 56.8
  Top Layer w0.254: P3.8 292.989,81.661 292.989,73.025 P7.1
  Top Layer w0.381: P2.2 275.082,107.95 281.051,101.981 281.051,93.599 P3.8
TX: P4.15 P5.2 | length 65.4
  Bottom Layer w0.381: P5.2@235.966,72.263 235.966,71.96 236.329,71.597 236.329,71.519 238.125,69.723 294.513,69.723 P4.15
pads on no net: P3.1 P3.2 P3.3 P3.4 P3.5 P3.6 P3.7 P3.10 P3.11 P3.12 P3.13 P4.1 P4.2 P4.3 P4.4 P4.5 P4.6 P4.7 P4.8 P4.13 P5.5 SW1.1 SW2.1

## Polygon pours and split planes (outlines as drawn)
NetC2_1 on Top Layer "NETC2_1_L01_P016" (solid, pour order 16): 132.461,106.807 133.985,106.807 133.985,108.69
A0 on Top Layer "A0_L01_P013" (solid, pour order 13): 278.765,44.577 279.527,45.339 280.289,44.577
+5 on Top Layer "+5_L01_P003" (solid, pour order 3): 140.462,92.837 138.176,90.551 139.065,90.551 143.51,90.551 143.637,90.678 141.478,92.837
9V on Top Layer "9V_L01_P000" (solid, pour order 0): 163.83,106.299 177.546,106.299 177.546,97.917 163.83,97.917
GND on Bottom Layer "GND_L02_P015" (solid, pour order 15): 143.256,105.41 141.986,104.14 145.288,104.14 144.018,105.41
GND on Bottom Layer "GND_L02_P014" (solid, pour order 14): 293.37,76.2 290.83,76.2 290.83,73.66 290.893,73.596
no net on Bottom Layer "NONET_L02_P009" (hatched 45Degree grid 1.397 track 0.203, pour order 9): 256.032,90.805 256.032,87.122 259.969,83.185 263.652,83.185 270.002,89.535 270.002,90.805 280.543,90.805 280.67,90.678 280.67,39.243 273.685,32.258 47.117,32.258 39.751,24.892 26.797,24.892 26.797,32.766 36.576,37.211 46.99,47.625 151.511,47.625 153.924,50.038 220.091,50.038 222.631,52.578 222.631,52.705 236.474,52.705 243.586,59.817 243.586,90.805
GND on Bottom Layer "GND_L02_P004" (solid, pour order 4): 197.993,86.106 201.549,86.106 201.549,75.692 197.993,75.692
GND on Bottom Layer "GND_L02_P002" (solid, pour order 2): 120.711,93.726 127.889,93.726 127.889,82.423 120.584,82.423
GND on Bottom Layer "GND_L02_P001" (solid, pour order 1): 164.973,106.299 164.973,97.663 151.257,97.663 151.257,106.172

## Keep-outs
Keep-Out Layer:
  the board outline again, w0.254

## Silkscreen, mask and mechanical layers (free items; w line width, h text height)
Top Overlay:
  drawing of 149 lines, arcs and shapes, not listed
  text "USB" at 288.925,108.585 h1.52
  text "9V BAT PWR" at 200.787,107.569 h1.52
  text "OFF" at 186.944,102.997 h1.52
  text "ON" at 196.85,102.997 h1.52
  text "5V" at 141.986,101.854 h1.52 r90
  text "Lakeshore West" at 55.118,100.838 h3.81
  text "GND" at 144.526,100.457 h1.52 r90
  text "PWR" at 139.192,100.33 h1.52 r90
  text "NANO 9V PWR" at 201.041,95.504 h1.52
  text "ON" at 196.85,91.059 h1.52
  text "OFF" at 187.071,90.932 h1.52
  text "Lakeshore East" at 55.372,90.424 h3.81
  text "MCU STATUS" at 202.819,83.566 h1.52
  text "UART-USB" at 232.918,83.058 h1.52 r90
  text "Traintracker" at 30.353,77.851 h5.08
  text "API CONN" at 203.073,77.343 h1.52
  text "HT16K33 LED Driver" at 263.906,77.343 h1.52 r90
  text "Arduino Nano" at 291.973,76.2 h1.52 r90
  text "SDA" at 294.513,64.389 h1.52
  text "SCL" at 294.513,61.849 h1.52
  text "Hamilton GO Centre" at 29.464,50.419 h1.52
  text "Bronte" at 82.042,33.379 h1.52 r45
  text "Pickering" at 255.038,33.357 h1.52 r45
  text "Burlington" at 56.029,33.23 h1.52 r45
  text "Appleby" at 68.983,33.23 h1.52 r45
  text "Scarborough" at 210.715,33.23 h1.52 r45
  text "Ajax" at 264.182,33.23 h1.52 r45
  text "West" at 9.906,33.125 h1.52 r45
  text "Oakville" at 95.504,33.125 h1.52 r45
  text "Rouge Hill" at 241.703,33.103 h1.52 r45
  text "Whitby" at 282.089,33.103 h1.52 r45
  text "Aldershot" at 46.99,32.998 h1.52 r45
  text "Clarkson" at 113.284,32.998 h1.52 r45
  text "Port Credit" at 127.127,32.998 h1.52 r45
  text "Mimico" at 153.416,32.998 h1.52 r45
  text "Exhibition" at 166.37,32.998 h1.52 r45
  text "Danforth" at 196.977,32.998 h1.52 r45
  text "Eglinton" at 219.859,32.976 h1.52 r45
  text "Union" at 177.038,32.871 h1.52 r45
  text "Guildwood" at 229.108,32.871 h1.52 r45
  text "Oshawa" at 291.338,32.871 h1.52 r45
  text "Long Branch" at 140.23,32.849 h1.52 r45
  text "Harbour" at 13.97,32.744 h1.52 r45
Bottom Overlay:
  text "9V" at 172.339,93.853 h1.52
  text "GND" at 160.274,93.726 h1.52
  text "3mm" at 188.214,55.88 h1.52
  text "3mm" at 145.034,55.753 h1.52
  text "Designed by: Geoffrey Fang" at 302.895,13.97 h1.52
Mechanical 1:
  lines w0.254: 151.841,50.103 151.841,96.509 ; 164.592,76.2 164.592,94.996 ; 177.305,50.059 177.305,96.465 ; 177.343,76.2 177.343,93.599

## Dimensions
164.592,76.2 to 177.343,76.2 on Mechanical 1
151.841,50.103 to 164.592,76.2 on Mechanical 1
170.942,100.699 to 185.942,61.341 on Mechanical 1
164.592,94.996 to 170.942,100.699 on Mechanical 1
143.242,61.341 to 158.242,100.701 on Mechanical 1
158.242,100.701 to 170.942,100.699 on Mechanical 1
127.254,91.948 to 304.8,114.3 on Mechanical 1
239.776,74.422 to 252.73,76.2 on Mechanical 1
239.776,74.422 to 304.8,114.3 on Mechanical 1
271.78,110.49 to 304.8,114.3 on Mechanical 1
271.78,110.49 to 283.21,109.22 on Mechanical 1
254,110.49 to 271.78,110.49 on Mechanical 1
298.45,109.22 to 304.8,114.3 on Mechanical 1
298.45,109.22 to 304.8,114.3 on Mechanical 1
283.21,109.22 to 298.45,109.22 on Mechanical 1